# EAGLE board PCB1M1A1 (EAGLE 6.2)

Size 160 x 100 mm. Coordinates in mm from the lower left corner, seen from the top.
Outline: 0,0 160,0 160,100 0,100 0,0
Copper layers (1*16): Top 0.035mm / dielectric 1.5mm / Bottom 0.035mm
Design rules: minimum track width 10mil, minimum drill 24mil, track to track 8mil, track to pad 8mil, pad to pad 8mil, via to via 8mil, smd to smd 8mil, copper to edge 40mil, drill to drill 8mil, minimum pad ring 10mil, minimum via ring 8mil, stop-mask expansion 4mil, vias tented up to drill 0mil, thermal gap 10mil

## Footprints (pad centres in the part's own frame; a part is rotated, then mirrored left to right if it is on the bottom)
R_1206 = smd 1.6 x 1.8: 1 -1.4,0; 2 1.4,0
C_1206 = smd 1.6 x 1.8: 1 -1.4,0; 2 1.4,0
J_MTA100_2P = drill 1.143 square: 1 1.27,0 | drill 1.143: 2 -1.27,0
J_MTA100_5P = drill 1.143 square: 1 5.08,0 | drill 1.143: 2 2.54,0; 3 0,0; 4 -2.54,0; 5 -5.08,0
SOT-223 = smd 1.2 x 2.2: 1 -2.3,-3.1; 2 0,-3.1; 3 2.3,-3.1 | smd 3.6 x 2.2: 4 0,3.1
SOIC8 = smd 2.2 x 0.6: 1 -2.6,1.905; 2 -2.6,0.635; 3 -2.6,-0.635; 4 -2.6,-1.905; 5 2.6,-1.905; 6 2.6,-0.635; 7 2.6,0.635; 8 2.6,1.905
R_2512 = smd 2.1 x 4: P$1 -3.15,0; P$2 3.05,0
D_DO214AC = smd 1.52 x 1.68: A 1.7,0; C -1.7,0

## Placement (x,y rotation side)
1K  [R_1206]  41.91,21.59 0 top
C1  0.1uF  [C_1206]  62.23,31.75 0 top
C2  0.1uF  [C_1206]  73.66,17.78 0 top
C3  15pF  [C_1206]  24.13,11.43 0 top
C4  [C_1206]  34.29,30.48 0 top
C5  15pF  [C_1206]  55.88,26.67 270 top
J1  [J_MTA100_2P]  5.08,31.75 270 top
J2  [J_MTA100_5P]  3.81,16.51 270 top
Q1  Q_BSP315P  [SOT-223]  58.42,60.96 0 top
Q2  Q_NDT014L  [SOT-223]  55.88,48.26 270 top
Q3  Q_LM35SOIC8  [SOIC8]  62.23,26.67 0 top
Q4  Q_INA146  [SOIC8]  73.66,12.7 0 top
R1  30  [R_2512]  62.23,68.58 0 top
R3  10k  [R_1206]  48.26,60.96 90 top
R4  1k  [R_1206]  52.07,55.88 270 top
R5  49.9k  [R_1206]  24.13,40.64 0 top
R6  12.4k  [R_1206]  29.21,19.05 0 top
Z1  D_SSA34-E3/61T  [D_DO214AC]  52.07,60.96 270 top

## Library data of the parts
1K C1-C5 R3-R6 = Lib_Passive
J1 J2 = Lib_TH
Q1-Q4 R1 = PCB0M1
Z1 = EE371

## Nets
+5V: C1.2 C2.2 J2.2 Q3.8 Q4.7
GATE: J2.3 R4.1
GND: C1.1 C2.1 C3.2 C5.2 J2.1 Q2.3 Q3.4 Q4.1 Q4.4 R6.1
N$2: Q1.4 R1.P$1
N$4: R3.2 Z1.C
N$7: 1K.1 Q2.4
N$9: Q2.1 R4.2
N$13: Q4.5 R5.1 R6.2
N$14: C3.1 Q4.8
TEMP: C5.1 J2.4 Q3.1
VIN+: C4.1 J1.2 Q4.3 R1.P$2
VIN-: C4.2 J1.1 Q1.3 Q4.2
VOLTS: J2.5 Q4.6 R5.2
Z1: 1K.2 Q1.1 R3.1 Z1.A

## Tracks (layer width: path | path; a pad name or v marks a point on that pad's centre or on a via)
+5V  (4 unrouted)
GATE  (1 unrouted)
GND  (9 unrouted)
N$2  (1 unrouted)
N$4  (1 unrouted)
N$7  (1 unrouted)
N$9  (1 unrouted)
N$13  (2 unrouted)
N$14  (1 unrouted)
TEMP  (2 unrouted)
VIN+  (3 unrouted)
VIN-  (3 unrouted)
VOLTS  (2 unrouted)
Z1  (3 unrouted)